# EAGLE board ControlBoard (EAGLE 7.0.0)
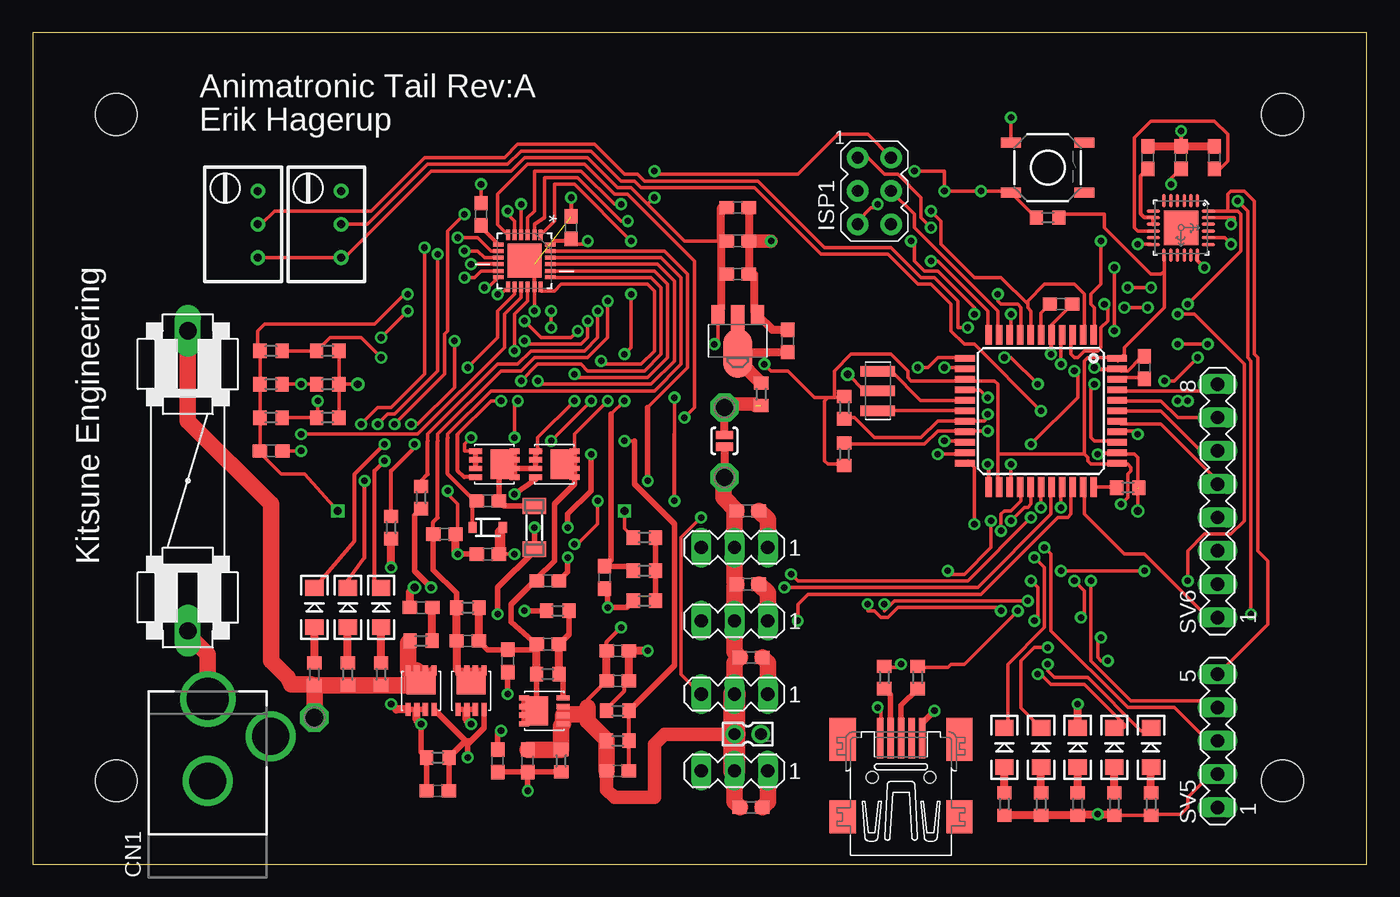
[diagram p0: board, top side]
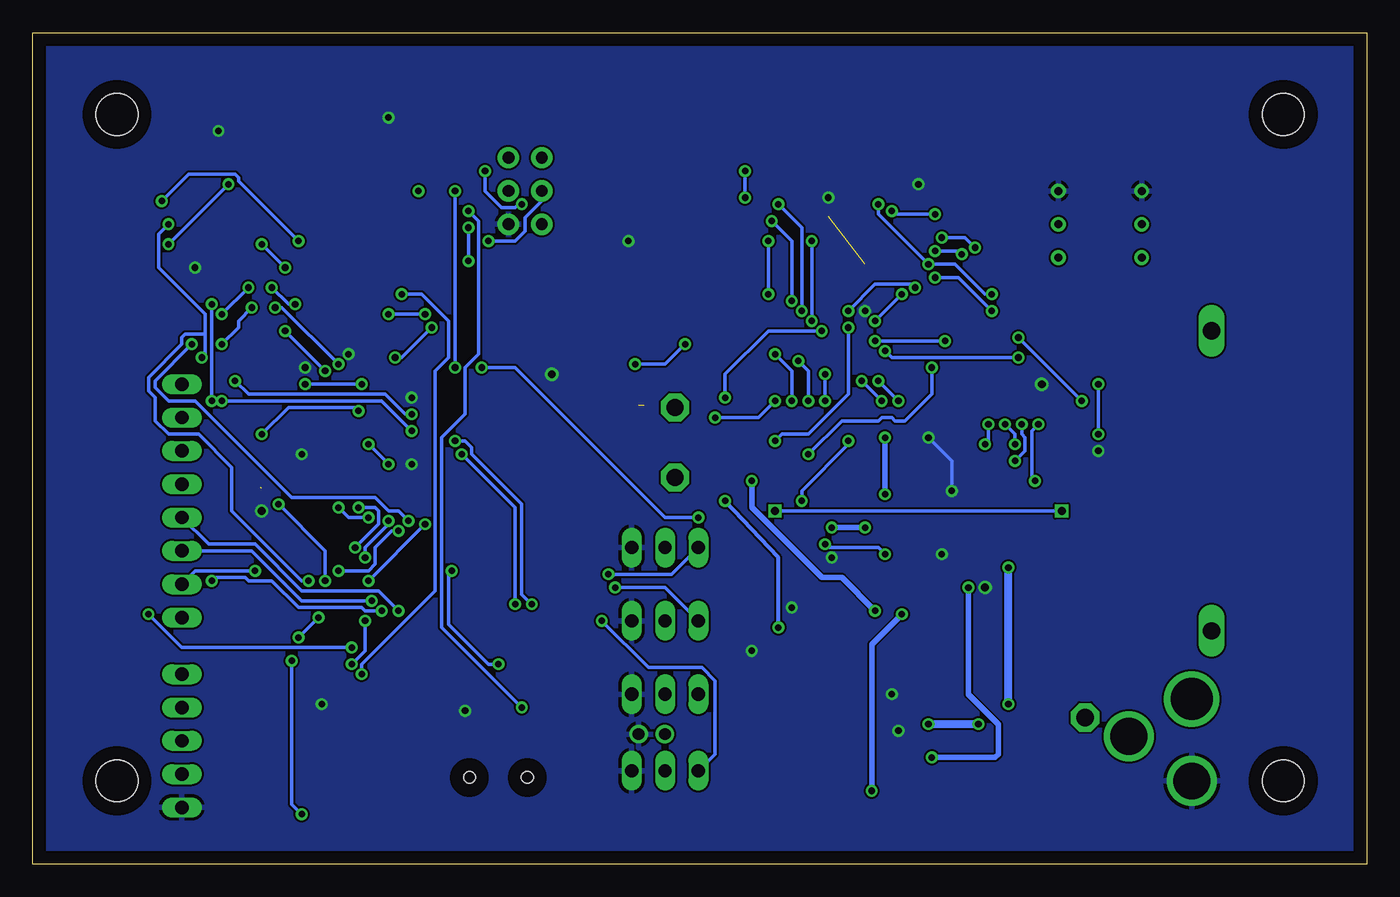
[diagram p1: board, bottom side, seen from below]

Size 101.65 x 63.36 mm. Coordinates in mm from the lower left corner, seen from the top.
Outline: 0,0 101.65,0 101.65,63.36 0,63.36 0,0
Copper layers (1*16): Top 0.035mm / dielectric 1.5mm / Bottom 0.035mm
Design rules "default *": minimum track width 10mil, minimum drill 13mil, track to track 6mil, track to pad 6mil, pad to pad 6mil, via to via 6mil, smd to smd 6mil, copper to edge 40mil, drill to drill 8mil, minimum pad ring 10mil, minimum via ring 8mil, stop-mask expansion 4mil, vias tented up to drill 0mil, thermal gap 10mil
Holes 3.2 mm at 6.35,57.15 6.35,6.35 95.25,6.35 95.25,57.15

## Footprints (pad centres in the part's own frame; a part is rotated, then mirrored left to right if it is on the bottom)
C0603 = smd 1.1 x 1: 1 -0.85,0; 2 0.85,0
DCJACK_2MM_PTH = drill 2.8: GND 0,7.35; GNDBREAK 4.8,10.75 | drill 3.2: PWR 0,13.6
SOD-323 = smd 0.63 x 0.83: A 1.15,0; C -1.15,0
FUSE = drill 1.321 long: 1 -11.43,0; 2 11.43,0
R0603 = smd 1 x 1.1: 1 -0.85,0; 2 0.85,0
TQFP44 = smd 1.5 x 0.5: 1 -5.8,4; 2 -5.8,3.2; 3 -5.8,2.4; 4 -5.8,1.6; 5 -5.8,0.8; 6 -5.8,0; 7 -5.8,-0.8; 8 -5.8,-1.6; 9 -5.8,-2.4; 10 -5.8,-3.2; 11 -5.8,-4; 23 5.8,-4; 24 5.8,-3.2; 25 5.8,-2.4; 26 5.8,-1.6; 27 5.8,-0.8; 28 5.8,0; 29 5.8,0.8; 30 5.8,1.6; 31 5.8,2.4; 32 5.8,3.2; 33 5.8,4 | smd 0.5 x 1.5: 12 -4,-5.8; 13 -3.2,-5.8; 14 -2.4,-5.8; 15 -1.6,-5.8; 16 -0.8,-5.8; 17 0,-5.8; 18 0.8,-5.8; 19 1.6,-5.8; 20 2.4,-5.8; 21 3.2,-5.8; 22 4,-5.8; 34 4,5.8; 35 3.2,5.8; 36 2.4,5.8; 37 1.6,5.8; 38 0.8,5.8; 39 0,5.8; 40 -0.8,5.8; 41 -1.6,5.8; 42 -2.4,5.8; 43 -3.2,5.8; 44 -4,5.8
SOT89 = smd 1 x 1.5: 1 -1.499,-1.981; 3 1.499,-1.981 | smd 1 x 2: 2 0,-1.727 | smd 2.2 x 3.7: 2@1 0,0.94
AVRISP = drill 0.9 pad 1.626: 1 -1.27,2.54; 2 1.27,2.54; 3 -1.27,0; 4 1.27,0; 5 -1.27,-2.54; 6 1.27,-2.54
SM-1206 = smd 1.2 x 1.8: 1 -1.65,0; 2 1.65,0
LED-1206 = smd 1.2 x 1.4: A -1.5,0; C 1.5,0
POWERPAK1212-8 = smd 0.762 x 0.406: D1 1.549,0.991; D2 1.549,0.33; D3 1.549,-0.33; D4 1.549,-0.991 | smd 1.727 x 2.235: DPAD 0.584,0 | smd 0.991 x 0.406: G -1.422,-0.991; S1 -1.422,0.991; S2 -1.422,0.33; S3 -1.422,-0.33
CSTCR6M = smd 0.8 x 2.6: 1 -1.5,0; 2 0,0; 3 1.5,0
RTRIM3299W = drill 0.61: 1 1.27,-2.54; 2 1.27,0; 3 1.27,2.54
TACTILE-SWITCH-SMD = smd 1.524 x 0.762: 1 -2.794,1.905; 2 2.794,1.905; 3 -2.794,-1.905; 4 2.794,-1.905
SJ_2S-NO = smd 0.635 x 1.27: 1 -0.45,0; 2 0.45,0
MA03-1 = drill 1.016 long: 1 -2.54,0; 2 0,0; 3 2.54,0
MA05-1 = drill 1.016 long: 1 -5.08,0; 2 -2.54,0; 3 0,0; 4 2.54,0; 5 5.08,0
MA08-1 = drill 1.016 long: 1 -8.89,0; 2 -6.35,0; 3 -3.81,0; 4 -1.27,0; 5 1.27,0; 6 3.81,0; 7 6.35,0; 8 8.89,0
P1-13 = drill 1.321 pad 2.159 octagon: TP 0,0
QFN50P400X400X100-25N = smd 0.813 x 0.305: 1 -1.981,1.245; 2 -1.981,0.762; 3 -1.981,0.254; 4 -1.981,-0.254; 5 -1.981,-0.762; 6 -1.981,-1.245; 13 1.981,-1.245; 14 1.981,-0.762; 15 1.981,-0.254; 16 1.981,0.254; 17 1.981,0.762; 18 1.981,1.245 | smd 0.305 x 0.813: 7 -1.245,-1.981; 8 -0.762,-1.981; 9 -0.254,-1.981; 10 0.254,-1.981; 11 0.762,-1.981; 12 1.245,-1.981; 19 1.245,1.981; 20 0.762,1.981; 21 0.254,1.981; 22 -0.254,1.981; 23 -0.762,1.981; 24 -1.245,1.981 | smd 2.591 x 2.591: 25 -0.025,0
QFN-24-4MM2 = smd 1.016 x 0.254: 1 -2.066,1.257; 2 -2.066,0.75; 3 -2.066,0.247; 4 -2.066,-0.287; 5 -2.066,-0.792; 6 -2.066,-1.297; 13 2.086,-1.297; 14 2.086,-0.792; 15 2.086,-0.287; 16 2.086,0.247; 17 2.086,0.75; 18 2.086,1.257 | smd 0.254 x 1.016: 7 -1.267,-2.122; 8 -0.762,-2.122; 9 -0.258,-2.122; 10 0.278,-2.122; 11 0.78,-2.122; 12 1.287,-2.122; 19 1.287,2.082; 20 0.78,2.082; 21 0.278,2.082; 22 -0.258,2.082; 23 -0.762,2.082; 24 -1.267,2.082 | smd 2.616 x 2.616: P$1 0.02,-0.01
32005-201 = smd 3.1 x 0.5: 1 3,1.6; 2 3,0.8; 3 3,0; 4 3,-0.8; 5 3,-1.6 | smd 2.5 x 2: M1 -3,-4.45; M2 -3,4.45 | smd 3.3 x 2: M3 2.9,4.45; M4 2.9,-4.45 | hole 0.9: 0,2.2; 0,-2.2
332-02 = drill 0.9 pad 1.27: 1 0,-1; 2 0,1

## Placement (x,y rotation side)
C1  0.1uF  [C0603]  53.72,44.96 0 top
C2  1uF  [C0603]  53.72,47.5 0 top
C3  10uF  [C0603]  53.72,50.04 0 top
C6  1uF  [C0603]  78.36,42.67 0 top
C7  0.1uF  [C0603]  84.71,37.85 90 top
C8  10uF  [C0603]  57.53,39.88 90 top
C9  0.1uF  [C0603]  84.96,53.85 90 top
C10  0.1uF  [C0603]  90.04,53.85 90 top
C11  2.2nF  [C0603]  87.5,53.85 90 top
C12  0.1uF  [C0603]  30.86,5.59 0 top
C13  2.2uF  [C0603]  29.59,19.56 180 top
C14  0.1uF  [C0603]  33.15,17.02 0 top
C15  0.1uF  [C0603]  31.37,25.15 0 top
C16  1uF  [C0603]  41.02,48.51 90 top
C17  0.1uF  [C0603]  18.16,31.5 0 top
C18  0.1uF  [C0603]  34.16,49.53 90 top
C19  0.1uF  [C0603]  43.56,21.84 270 top
C20  0.1uF  [C0603]  34.67,23.62 180 top
C21  0.1uF  [C0603]  34.67,27.69 0 top
C22  0.1uF  [C0603]  37.72,7.87 90 top
C23  0.1uF  [C0603]  35.43,7.87 90 top
C24  10uF  [C0603]  44.58,16.26 0 top
C25  10uF  [C0603]  44.58,13.97 0 top
C26  22pF  [C0603]  44.58,7.11 0 top
C27  10uF  [C0603]  39.24,21.59 0 top
C28  0.1uF  [C0603]  39.24,16.76 0 top
C29  10uF  [C0603]  36.2,15.49 270 top
C30  10uF  [C0603]  54.74,15.75 0 top
C31  10uF  [C0603]  54.74,4.32 0 top
C32  10uF  [C0603]  54.48,21.34 0 top
C33  10uF  [C0603]  54.48,26.92 0 top
CN1  [DCJACK_2MM_PTH]  13.34,-1.02 0 top
D1  BAT20JFILM  [SOD-323]  34.67,25.65 0 top
F1  [FUSE]  11.81,29.21 90 top
F2  500mA  [R0603]  55.5,35.81 270 top
IC1  32U4  [TQFP44]  76.83,34.54 270 top
IC2  MCP170312MB  [SOT89]  53.72,39.88 180 top
ISP1  AVRISP-6  [AVRISP]  64.14,51.31 0 top
L1  8.2uH  [SM-1206]  38.23,25.65 270 top
LED1  RED  [LED-1206]  79.63,8.89 90 top
LED2  RED  [LED-1206]  76.83,8.89 90 top
LED3  RED  [LED-1206]  74.04,8.89 90 top
LED4  RED  [LED-1206]  21.46,19.56 90 top
LED5  RED  [LED-1206]  24,19.56 90 top
LED6  RED  [LED-1206]  26.54,19.56 90 top
LED7  RED  [LED-1206]  85.22,8.89 90 top
LED8  RED  [LED-1206]  82.42,8.89 90 top
Q2  MOSFET-NCHANNELSI7820DN  [POWERPAK1212-8]  35.18,30.48 0 top
Q3  MOSFET-NCHANNELSI7820DN  [POWERPAK1212-8]  39.75,30.48 0 top
Q4  CSTCR6M00G53Z  [CSTCR6M]  64.39,36.07 90 top
R1  22  [R0603]  64.9,14.22 270 top
R2  22  [R0603]  67.44,14.22 270 top
R3  1000  [R0603]  79.63,4.57 270 top
R4  10k  [RTRIM3299W]  15.88,48.77 0 top
R5  10k  [RTRIM3299W]  22.23,48.77 0 top
R6  10k  [R0603]  77.34,49.28 0 top
R7  10k  [R0603]  61.85,34.8 90 top
R8  10k  [R0603]  61.85,31.24 270 top
R9  1000  [R0603]  76.83,4.57 270 top
R10  1000  [R0603]  74.04,4.57 270 top
R11  100k  [R0603]  30.86,8.13 180 top
R12  2  [R0603]  29.59,17.02 180 top
R13  0.01  [R0603]  33.15,19.56 180 top
R14  10  [R0603]  27.3,25.65 270 top
R15  1k  [R0603]  29.59,27.94 270 top
R16  100k  [R0603]  18.16,39.12 180 top
R17  100k  [R0603]  18.16,36.58 180 top
R18  100k  [R0603]  18.16,34.04 180 top
R19  32.4k  [R0603]  22.48,39.12 180 top
R20  10k  [R0603]  22.48,36.58 180 top
R21  22.1k  [R0603]  22.48,34.04 180 top
R22  10k  [R0603]  24,14.48 90 top
R23  10k  [R0603]  21.46,14.48 90 top
R24  10k  [R0603]  26.54,14.48 90 top
R25  32.4k  [R0603]  46.61,24.89 180 top
R26  32.4k  [R0603]  46.61,20.07 0 top
R27  32.4k  [R0603]  46.61,22.35 0 top
R28  0.01  [R0603]  40.26,7.87 270 top
R29  500k  [R0603]  44.58,9.4 180 top
R30  100k  [R0603]  44.58,11.68 0 top
R31  1k  [R0603]  40.01,19.3 180 top
R32  100k  [R0603]  39.24,14.48 0 top
R33  1k  [R0603]  83.44,28.7 180 top
R34  1000  [R0603]  85.22,4.57 270 top
R35  1000  [R0603]  82.42,4.57 270 top
S1  SWITCH-MOMENTARY-2SMD  [TACTILE-SWITCH-SMD]  77.34,53.09 0 top
SJ1  SOLDERJUMPERNO  [SJ_2S-NO]  52.7,32.26 270 top
SV1  [MA03-1]  53.47,7.11 180 top
SV2  [MA03-1]  53.47,12.95 180 top
SV3  [MA03-1]  53.47,24.13 180 top
SV4  [MA03-1]  53.47,18.54 180 top
SV5  [MA05-1]  90.3,9.4 90 top
SV6  [MA08-1]  90.3,27.69 90 top
TP1  PTR1PAD1-13  [P1-13]  21.46,11.18 0 top
TP2  PTR1PAD1-13  [P1-13]  52.7,34.8 270 top
TP3  PTR1PAD1-13  [P1-13]  52.7,29.46 270 top
U1  BQ24630RGET  [QFN50P400X400X100-25N]  37.47,45.97 270 top
U$2  MPU-6050-1  [QFN-24-4MM2]  87.5,48.51 270 top
U$3  SI7617DN-T1-GE3  [POWERPAK1212-8]  29.59,13.21 90 top
U$4  SI7617DN-T1-GE3  [POWERPAK1212-8]  33.4,13.21 90 top
U$6  SI7617DN-T1-GE3  [POWERPAK1212-8]  38.99,11.68 180 top
X1  MINI-USB-32005-201  [32005-201]  66.17,6.6 90 top
X2  332-02  [332-02]  54.48,9.91 90 top

## Library data of the parts
C1-C3 C6-C33 = eagle-ltspice; SPICEMODEL: NONE; SPICEPREFIX: C
CN1 IC1 ISP1 = adafruit
D1 = SparkFun-DiscreteSemi; PROD_ID: DIO-11623
F1 = special
F2 R1-R3 R6-R35 = eagle-ltspice; SPICEMODEL: NONE; SPICEPREFIX: R
IC2 = linear
L1 = inductor-neosid; OC_FARNELL: unknown; OC_NEWARK: unknown
LED1-LED8 = SparkFun-LED
Q2 Q3 = SparkFun-DiscreteSemi; PROD_ID: TRANS-11055
Q4 = murata-filter; MPN: CSTCR6M00G53-R0; OC_FARNELL: 1170434; OC_NEWARK: 25M8759
R4 R5 = rcl
S1 = SparkFun-Electromechanical; PROD_ID: SWCH-08247
SJ1 = SparkFun
SV1-SV6 = con-lstb; OC_FARNELL: unknown; OC_NEWARK: unknown
TP1-TP3 = testpad
U1 = Texas Instruments_By_element14_Batch_1; MPN: BQ24630RGET; OC_FARNELL: 1815719; OC_NEWARK: 63R8367; PACKAGE: VQFN-24; SUPPLIER: Texas Instruments
U$2 = Testing
U$3 U$4 U$6 = SparkFun-DiscreteSemi
X1 = con-cypressindustries; OC_FARNELL: unknown; OC_NEWARK: unknown
X2 = con-garry

## Nets
A2: IC1.38 SV6.5
A3: IC1.39 SV6.6
A4: IC1.40 SV6.7
A5: IC1.41 SV6.8
ADAPTER+: F1.2 R12.2 R22.1 R23.1 R24.1 TP1.TP U$3.D1 U$3.D2 U$3.D3 U$3.D4 U$3.DPAD
D0: IC1.20 SV6.4
D1: IC1.21 SV6.3
D12: IC1.26 SV6.2
D13: IC1.32 SV6.1
D+: IC1.4 R1.1
D-: IC1.3 R2.1
GND: C1.2 C2.2 C3.2 C6.2 C7.2 C8.2 C9.2 C10.2 C11.2 C13.2 C15.2 C16.2 C17.2 C18.2 C19.2 C20.2 C23.2 C24.2 C25.2 C27.2 C29.2 C30.2 C31.2 C32.2 C33.2 CN1.GND IC1.5 IC1.15 IC1.23 IC1.35 IC1.43 IC2.1 ISP1.6 LED1.C Q2.S1 Q2.S2 Q2.S3 Q4.2 R4.3 R5.3 R19.1 R20.1 R21.1 R26.1 R30.1 R33.1 S1.1 SV1.1 SV2.1 SV3.1 SV4.1 SV5.1 U1.17 U1.25 U$2.18 X1.5 X2.1
GNDBREAK: CN1.GNDBREAK
IMUINT1: IC1.25 U$2.12
IMUINT2: IC1.28 SV5.3
LED1: IC1.27 LED3.C
LED2: IC1.1 LED2.C
MISO: IC1.11 ISP1.1
MOSI: IC1.10 ISP1.4
N$1: IC1.16 Q4.3
N$2: IC1.17 Q4.1
N$3: R2.2 X1.3
N$4: C6.1 IC1.6
N$5: C7.1 IC1.42
N$6: C8.1 F2.1 IC2.2 IC2.2@1
N$7: C9.1 U$2.8 U$2.9
N$8: C11.1 U$2.20
N$9: R1.2 X1.2
N$10: C10.1 U$2.10
N$11: LED1.A R3.1
N$12: LED3.A R10.1
N$13: LED2.A R9.1
N$14: C12.1 R11.2 R14.2 U$3.S1 U$3.S2 U$3.S3 U$4.S1 U$4.S2 U$4.S3
N$15: C12.2 R11.1 R15.2 U$3.G U$4.G
N$16: C13.1 R12.1
N$17: C14.1 C15.1 R13.2 U1.2 U$4.D1 U$4.D2 U$4.D3 U$4.D4 U$4.DPAD
N$19: R15.1 U1.3
N$20: C16.1 R14.1 U1.24
N$21: R16.1 R19.2 U1.16
N$22: R17.1 R20.2 U1.15
N$23: R18.1 R21.2 U1.11
N$24: C18.1 U1.7
N$25: C19.1 R27.1 U1.6
N$26: LED5.C U1.8
N$27: LED4.C U1.5
N$28: LED6.C U1.9
N$29: LED6.A R24.2
N$30: LED4.A R23.2
N$31: LED5.A R22.2
N$32: R25.1 R26.2 R27.2
N$33: C21.1 D1.C U1.22
N$34: C20.1 D1.A U1.18
N$35: C21.2 L1.1 Q2.D1 Q2.D2 Q2.D3 Q2.D4 Q2.DPAD Q3.S1 Q3.S2 Q3.S3 U1.20
N$36: Q2.G U1.19
N$37: Q3.G U1.21
N$38: C26.2 R29.1 R30.2 U1.12
N$39: R31.2 U1.23
N$40: C28.2 R31.1 R32.2 U$6.G
N$41: C22.1 C23.1 L1.2 R28.2 U1.14
N$43: CN1.PWR F1.1
N$44: F2.2 SJ1.1 TP2.TP
N$45: LED7.A R34.1
N$46: LED8.A R35.1
N$49: IC1.33 R33.2
PWM1: IC1.31 SV1.3
PWM2: IC1.12 SV2.3
PWM3: IC1.30 SV3.3
PWM4: IC1.29 SV4.3
RST: IC1.13 ISP1.5 R6.1 S1.3
RXLED: IC1.8 LED8.C
SCK: IC1.9 ISP1.3
SCL: IC1.18 R7.1 SV5.4 U$2.23
SDA: IC1.19 R8.1 SV5.5 U$2.24
TRIM1: IC1.36 R4.2
TRIM2: IC1.37 R5.2
TXLED: IC1.22 LED7.C
UVCC: IC1.2 IC1.7 X1.1
VCC: C1.1 C2.1 C3.1 IC1.14 IC1.24 IC1.34 IC1.44 IC2.3 ISP1.2 R3.2 R4.1 R5.1 R6.2 R7.2 R8.2 R9.2 R10.2 R34.2 R35.2 SV5.2 U$2.13
VPACK+: C22.2 C24.1 C25.1 C26.1 C30.1 C31.1 C32.1 C33.1 R28.1 R29.2 SJ1.2 SV1.2 SV2.2 SV3.2 SV4.2 TP3.TP U1.13 U$6.S1 U$6.S2 U$6.S3 X2.2
VREF: C17.1 R16.2 R17.2 R18.2 R25.2 U1.4 U1.10
VSYSTEM: C14.2 C27.1 C28.1 C29.1 Q3.D1 Q3.D2 Q3.D3 Q3.D4 Q3.DPAD R13.1 R32.1 U1.1 U$6.D1 U$6.D2 U$6.D3 U$6.D4 U$6.DPAD

## Tracks (layer width: path | path; a pad name or v marks a point on that pad's centre or on a via)
A2
  Top 0.254: IC1.38 82.93,33.53 85.98,33.53 90.55,28.96 SV6.5
A3
  Top 0.254: IC1.39 85.98,34.54 89.03,31.5 SV6.6
A4
  Top 0.254: IC1.40 82.68,35.31 85.98,35.31 87.25,34.04 SV6.7
A5
  Top 0.254: IC1.41 82.68,36.07 89.79,36.07 SV6.8
ADAPTER+
  Top 0.406: U$3.DPAD 29.26,14.12 29.26,14.22 U$3.D2 U$3.D3 U$3.D4 30.44,14.9
  Top 0.61: 28.6,16.88 R12.2 | 28.57,14.73 U$3.D1 | 28.66,13.63 29.26,14.22
  Top 0.813: 21.21,13.72 R23.1
  Top 1.27: U$3.D2 U$3.D1 28.6,16.88 | TP1.TP R23.1 R22.1 R24.1 28.66,13.63 | 21.21,13.72 19.68,13.72 19.43,14.22 18.16,15.49 18.16,27.43 11.81,33.78 F1.2
D0  (via drill 0.5)
  Top 0.254: v63.63,19.81 63.63,19.3 64.14,19.3 64.64,18.8 65.15,18.8 65.91,19.56 73.53,19.56 v73.79,19.3 | v69.47,32.26 70.99,32.26 IC1.20
  Bottom 0.254: v63.63,19.81 64.39,20.57 64.39,27.43 68.2,31.24 68.2,31.75 68.71,32.26 v69.47,32.26 | v73.79,19.3 75.31,20.83 81.15,20.83 84.71,24.38 88.27,24.38 SV6.4
D1  (via drill 0.5)
  Top 0.254: v64.9,19.81 64.9,19.3 65.66,20.07 v75.82,20.07 | v68.96,31.24 70.99,31.24 IC1.21
  Bottom 0.254: v64.9,19.81 64.9,27.18 v68.96,31.24 | v75.82,20.07 81.15,20.07 84.96,23.88 SV6.3
D12  (via drill 0.5)
  Top 0.254: 73.79,25.15 v73.79,25.4 73.79,26.67 74.04,26.92 74.55,26.92 75.31,27.69 75.31,28.7 IC1.26 | v78.36,22.35 v84.71,22.35
  Bottom 0.254: v73.79,25.4 74.3,25.4 75.56,24.13 75.56,22.86 76.07,22.35 v78.36,22.35 | v84.71,22.35 89.28,22.35 SV6.2
D13
  Top 0.254: IC1.32 80.14,28.7 80.14,26.67 83.19,23.62 84.71,23.62 89.53,18.8 SV6.1
D+  (via drill 0.5)
  Top 0.254: v78.36,38.1 78.36,40.13 IC1.4 | v84.96,42.42 v83.19,42.42 | v89.53,39.62 v87.25,39.62 | v73.03,26.16 73.03,24.13 70.99,22.1 69.98,22.1 v69.72,22.35 | v66.17,15.24 65.91,14.99 64.9,14.99 R1.1
  Bottom 0.254: v83.19,42.42 82.68,42.42 v78.36,38.1 | v89.53,39.62 92.33,36.83 92.33,36.32 91.31,35.31 89.28,35.31 81.92,27.94 75.56,27.94 74.55,26.92 73.79,26.92 v73.03,26.16 | v69.72,22.35 69.98,22.1 69.98,18.29 66.93,15.24 v66.17,15.24 | v87.25,39.62 85.98,40.89 85.98,41.4 v84.96,42.42
D-  (via drill 0.5)
  Top 0.254: v81.66,42.67 81.92,42.42 81.92,41.4 81.41,40.89 81.41,39.37 81.15,39.12 80.14,39.12 79.63,38.61 79.38,38.61 79.12,38.86 79.12,40.13 IC1.3 | v85.22,43.94 v83.44,43.94 | v87.25,41.91 88.52,41.91 92.33,38.1 92.33,26.16 91.31,25.15 89.28,25.15 88.01,23.88 v88.01,21.59 | v75.06,19.3 70.99,15.24 69.98,15.24 69.72,14.99 67.44,14.99 R2.1
  Bottom 0.254: v83.44,43.94 82.17,42.67 v81.66,42.67 | v87.25,41.91 v85.22,43.94 | v88.01,21.59 87.76,21.84 85.47,21.84 85.22,21.59 83.44,21.59 81.41,19.56 76.58,19.56 76.33,19.3 v75.06,19.3
GND  (via drill 0.5, 0.6)  (2 unrouted)
  Top 0.254: R21.1 R20.1 | R20.1 R19.1 | R20.1 v24.77,36.58 | C17.2 v20.45,31.5 | 38.23,43.94 U1.17 v38.23,42.16 | C15.2 32.38,25.4 32.38,27.43 31.62,28.19 v31.62,28.45 | v33.4,32.51 32.89,32 32.89,31.5 33.66,31.5 Q2.S1 | v74.55,56.9 S1.1 74.55,54.86 | C18.2 v34.16,51.82 | v84.2,26.92 84.2,28.61 | v62.1,37.34 63.37,36.07 Q4.2 | v72.77,35.56 72.19,36.14 IC1.15 | C6.2 77.64,41.1 IC1.5 | IC1.43 82.93,37.59 83.44,37.59 84.45,38.61 C7.2 | IC1.35 82.68,31.24 83.95,31.24 84.2,30.99 84.2,29.21 84.45,28.96 84.45,28.7 R33.1
  Top 0.305: v72.77,30.48 72.83,30.42 IC1.23 | v77.6,38.86 77.64,38.9 IC1.5 | v80.9,37.85 81,37.74 IC1.43 | v81.15,31.24 81.31,31.34 IC1.35 | v87.5,55.88 C11.2 | v89.28,45.47 88.76,45.99 U$2.18 | U1.17 38.23,45.72 37.74,45.72 U1.25 | v41.02,50.8 C16.2 | R30.1 43.73,11.85 45.09,13.21 45.09,13.63 C25.2
  Top 0.406: Q2.S3 Q2.S2 Q2.S1 | v68.71,11.68 67.77,10.74 X1.5 | v36.2,12.95 C29.2 | C23.2 35.43,9.91 v35.69,10.16 | v32.38,23.62 C20.2 | R26.1 45.25,19.56 v43.81,19.56 43.81,20.74 C19.2 | C27.2 40.77,22.26 v40.77,23.37
  Top 0.61: C3.2 C2.2 C1.2 54.99,44.96 54.99,42.09 IC2.1 56.35,40.73 C8.2 | C10.2 C11.2 C9.2 | C13.2 28.74,20.74 v29.08,21.08 | C25.2 C24.2 v46.86,16.26 | v32.38,23.62 32.22,23.79 C15.2 | LED1.C v79.63,12.19
  Top 1.016: v56.26,47.5 C2.2
  Top 1.27: SV2.1 56.01,15.33 C30.2 | C31.2 56.01,4.74 SV1.1 | SV4.1 56.01,20.66 C32.2 | SV3.1 56.01,26.25 C33.2
  Bottom 0.254: v31.62,28.45 31.62,30.73 v33.4,32.51
  pour Bottom: 0,76.07 101.73,76.07 101.73,0 0,0
IMUINT1  (via drill 0.5)
  Top 0.254: v82.42,45.47 v82.42,40.64 | v84.2,47.24 85.22,47.24 U$2.12 | v79.38,37.59 79.63,37.34 79.63,35.56 v76.07,32 | v74.55,30.48 74.55,28.96 IC1.25
  Bottom 0.254: v84.2,47.24 v82.42,45.47 | v79.38,37.59 v82.42,40.64 | v74.55,30.48 v76.07,32
IMUINT2  (via drill 0.5)
  Top 0.254: v77.09,24.13 77.6,23.62 77.6,17.78 83.44,11.94 87,11.94 89.53,9.4 SV5.3 | IC1.28 v76.83,27.18
  Bottom 0.254: v77.09,24.13 75.31,25.91 75.31,26.92 75.56,27.18 v76.83,27.18
LED1  (via drill 0.5)
  Top 0.254: LED3.C 74.3,10.67 74.3,15.24 77.09,18.03 77.09,22.61 v76.33,23.37 | v74.55,26.16 75.56,27.18 75.82,27.18 76.07,27.43 76.07,28.7 IC1.27
  Bottom 0.254: v76.33,23.37 76.33,24.13 74.55,25.91 v74.55,26.16
LED2  (via drill 0.5)
  Top 0.254: LED2.C 75.31,11.91 75.31,15.49 76.33,16.51 v77.34,16.51 | v81.41,47.5 81.41,44.2 80.64,43.43 80.64,42.67 80.9,42.42 80.9,40.39 IC1.1 | v91.82,50.55 92.58,49.78 92.58,38.61 92.84,38.35 v92.84,19.05
  Bottom 0.254: v81.41,47.5 85.98,52.07 85.98,52.32 86.23,52.58 89.79,52.58 v91.82,50.55 | v92.84,19.05 90.3,16.51 v77.34,16.51
MISO  (via drill 0.5)
  Top 0.254: v68.45,48.51 67.69,49.28 67.69,50.8 65.91,52.58 64.9,52.58 63.63,53.85 ISP1.1 | v68.45,45.97 68.96,45.97 72.77,42.16 72.77,40.39 IC1.11
  Bottom 0.254: v68.45,45.97 v68.45,48.51
MOSI
  Top 0.254: ISP1.4 67.18,49.53 67.18,48.51 73.53,42.16 73.53,40.39 IC1.10
N$1
  Top 0.254: IC1.16 67.65,35.34 65.43,37.57 Q4.3
N$2
  Top 0.254: Q4.1 71.01,34.57 IC1.17
N$3
  Top 0.406: R2.2 66.17,12.1 X1.3
N$4
  Top 0.254: C6.1 76.83,42 IC1.6
N$5
  Top 0.254: IC1.42 82.93,37.08 84.45,37.08 C7.1
N$6
  Top 0.406: IC2.2 53.72,39.62 IC2.2@1
  Top 0.61: IC2.2@1 53.81,39.03 C8.1
  Top 1.016: F2.1 53.72,38.44 53.72,39.62
N$7
  Top 0.305: U$2.9 U$2.8 84.71,49.28 84.45,49.53 84.45,52.49 C9.1
N$8  (via drill 0.5)
  Top 0.254: C11.1 86.74,52.24 v86.74,51.82 | v91.31,47.24 90.82,47.73 U$2.20
  Bottom 0.254: v86.74,51.82 v91.31,47.24
N$9
  Top 0.406: R1.2 65.37,12.9 X1.2
N$10
  Top 0.254: C10.1 90.04,52.83 90.3,52.83 91.06,53.59 91.06,55.63 90.04,56.64 85.22,56.64 83.95,55.37 83.95,48.51 84.2,48.26 85.22,48.26 U$2.10
N$11
  Top 0.61: R3.1 LED1.A
N$12
  Top 0.61: R10.1 LED3.A
N$13
  Top 0.61: R9.1 LED2.A
N$14  (via drill 0.5)
  Top 0.406: C12.1 R11.2 29.59,8.55 v29.59,10.67 | U$3.S3 U$3.S2 U$3.S1 | U$4.S3 U$4.S2 U$4.S1
  Top 0.61: v33.4,10.67 33.07,11 U$4.S2 | v29.59,10.67 29.26,11 U$3.S2 | U$3.S1 27.71,11.79 v27.3,12.19 | v27.3,22.61 R14.2
  Bottom 0.61: v29.59,10.67 v33.4,10.67 | v27.3,12.19 v27.3,22.61
N$15  (via drill 0.5)
  Top 0.406: C12.2 R11.1 32.97,9.39 32.97,9.4 | U$3.G 32.97,9.4 | 32.97,9.4 33.4,9.4 | 33.4,9.4 34.39,10.39 U$4.G | 33.4,9.4 33.15,9.14 v33.15,8.13 | R15.2 29.08,26.58 29.08,22.35 v30.35,21.08
  Bottom 0.406: v33.15,8.13 28.32,8.13 28.07,8.38 28.07,10.67 30.35,12.95 v30.35,21.08
N$16
  Top 0.61: R12.1 C13.1
N$17  (via drill 0.5)
  Top 0.254: U1.2 38.23,48.77 38.99,49.28 38.99,52.32 41.53,52.32 44.83,49.02 v45.34,49.02 | v43.81,42.93 43.81,40.13 42.29,38.61 38.23,38.61 37.21,37.59 35.69,37.59 30.86,32.77 30.86,32.26
  Top 0.305: C15.1 30.52,26.07 30.86,26.42 30.86,32.26
  Top 0.406: U$4.DPAD 33.07,14.12 U$4.D2 | U$4.D1 U$4.D2 | U$4.D2 U$4.D3 U$4.D4 | R13.2 32.3,20.66 30.52,22.44 C15.1
  Top 0.61: R13.2 C14.1 32.3,14.87 U$4.D1
  Bottom 0.254: v43.81,42.93 43.81,47.5 v45.34,49.02
N$19  (via drill 0.5)
  Top 0.254: U1.3 37.72,49.28 38.23,49.78 38.23,52.83 41.78,52.83 44.32,50.29 v44.83,50.29 | v43.05,42.16 43.05,40.13 42.04,39.12 37.97,39.12 36.96,38.1 35.43,38.1 30.1,32.77 30.1,32.26
  Top 0.305: R15.1 29.59,29.21 30.1,29.72 30.1,32.26
  Bottom 0.254: v43.05,42.16 43.05,48.51 v44.83,50.29
N$20  (via drill 0.5)
  Top 0.254: v42.29,41.4 42.29,40.13 41.78,39.62 37.72,39.62 v37.47,39.88 | v42.29,47.5 42.04,47.24 41.02,47.24 40.77,47.5 C16.1 | v32.13,39.88 32.13,36.32 29.34,33.53 v28.83,33.53
  Top 0.305: C16.1 40.93,47.66 40.77,47.5 39.73,47.5 U1.24 | R14.1 27.3,29.97 29.08,31.75 v29.08,32 29.08,32.26
  Bottom 0.254: v42.29,47.5 v42.29,41.4 | v32.13,39.88 v37.47,39.88 | v28.83,33.53 28.83,32.26 v29.08,32
N$21  (via drill 0.5)
  Top 0.254: R16.1 R19.2 22.64,40.13 25.02,40.13 v26.54,38.61 | U1.16 37.72,42.93 36.7,41.91 v36.7,39.12
  Bottom 0.254: v36.7,39.12 36.2,38.61 v26.54,38.61
N$22  (via drill 0.5)
  Top 0.254: R17.1 v20.45,36.58 R20.2 | v20.45,32.77 29.34,32.77 35.94,39.37 35.94,41.91 37.21,43.18 U1.15
  Bottom 0.254: v20.45,36.58 v20.45,32.77
N$23  (via drill 0.5)
  Top 0.254: R18.1 R21.2 21.72,34.04 v21.72,35.31 | U1.11 34.16,45.21 33.66,44.7 v32.89,44.7 | v26.54,40.13 v28.57,42.16
  Bottom 0.254: v21.72,35.31 v26.54,40.13 | v32.89,44.7 31.11,44.7 v28.57,42.16
N$24
  Top 0.305: U1.7 34.16,48.54
  Top 0.406: 34.16,48.54 C18.1
N$25  (via drill 0.5)
  Top 0.254: U1.6 35.43,48.74 35.43,51.05 37.72,53.34 42.04,53.34 44.32,51.05 45.34,51.05 50.42,45.97 50.42,34.8 v49.66,34.04 | 44.07,34.29 v45.09,35.31
  Top 0.406: R27.1 45.42,22.69 C19.1 44.07,23.2 44.07,34.29
  Bottom 0.254: v45.09,35.31 46.35,34.04 v49.66,34.04
N$26  (via drill 0.5)
  Top 0.254: U1.8 34.92,46.74 33.91,47.75 v32.38,47.75 | v25.02,33.53 26.29,34.8 27.3,34.8 29.84,37.34 v29.84,46.99
  Top 0.305: LED5.C 24,21.59 25.27,23.37 v25.27,29.21
  Bottom 0.254: v25.02,33.53 25.53,33.02 25.53,29.46 v25.27,29.21 | v29.84,46.99 30.61,47.75 v32.38,47.75
N$27  (via drill 0.5)
  Top 0.254: U1.5 36.7,49.02 36.2,49.53 v36.2,49.78 | v27.56,33.53 31.37,37.34 31.37,40.39 31.62,40.64 31.62,48.26 v32.89,49.53
  Top 0.305: LED4.C 24.51,24.64 24.51,29.72 v26.8,32
  Bottom 0.254: v36.2,49.78 35.94,49.53 v32.89,49.53 | v27.56,33.53 26.8,32.77 v26.8,32
N$28  (via drill 0.5)
  Top 0.254: U1.9 34.42,46.23 33.91,46.74 v32.89,46.74 | v26.29,33.53 27.05,34.29 27.56,34.29 30.86,37.59 v30.86,46.48
  Top 0.305: LED6.C 26.06,21.06 26.04,24.13 26.04,29.97 v26.8,30.73
  Bottom 0.254: v26.29,33.53 26.29,32.77 26.04,32.51 26.04,31.5 v26.8,30.73 | v32.89,46.74 31.11,46.74 v30.86,46.48
N$29
  Top 0.61: R24.2 LED6.A
N$30
  Top 0.61: R23.2 LED4.A
N$31
  Top 0.61: R22.2 LED5.A
N$32
  Top 0.406: R26.2 R27.2 R25.1
N$33
  Top 0.254: U1.22 47.88,46.23 49.4,44.7 49.4,38.1 47.37,36.07 34.92,36.07 31.62,32.77 31.62,32.51
  Top 0.305: D1.C 33.52,27.39 C21.1 33.66,27.69 31.62,29.72 31.62,32.51
N$34  (via drill 0.5)
  Top 0.254: v43.31,38.35 43.56,38.1 46.35,38.1 47.37,39.12 47.37,43.69 46.86,44.2 40.26,44.2 39.75,43.69 38.73,43.69 38.73,43.94 U1.18 | 39.75,32.51 v42.55,35.31 | v41.27,24.38 41.53,24.38 43.05,25.91 v43.05,27.69 | C20.1 v36.7,23.62
  Top 0.305: D1.A 35.82,23.76 | v39.5,32.26 39.75,32.51
  Top 0.61: C20.1 35.52,25.35 D1.A
  Bottom 0.254: v41.27,24.38 41.02,24.13 37.21,24.13 v36.7,23.62 | v43.05,27.69 43.05,28.45 39.5,32 v39.5,32.26 | v43.31,38.35 42.55,37.59 v42.55,35.31
N$35  (via drill 0.5)
  Top 0.254: U1.20 47.37,45.21 48.39,44.2 48.39,38.61 46.86,37.08 41.53,37.08 v41.27,37.34 | v41.27,35.31 38.48,32.51 38.48,31.75 38.73,31.5 38.48,31.24 38.33,31.24
  Top 0.406: Q3.S1 38.33,31.24 Q3.S2 Q3.S3 Q2.D3 | Q2.D3 36.09,30.15 Q2.DPAD 35.52,30.24 C21.2 35.9,27.3 L1.1 | Q2.D4 Q2.D3 | Q2.D3 Q2.D2 Q2.D1
  Bottom 0.254: v41.27,35.31 v41.27,37.34
N$36  (via drill 0.5)
  Top 0.254: U1.19 39.47,44.7 47.12,44.7 47.88,43.94 47.88,38.86 46.61,37.59 42.29,37.59 41.78,38.1 38.48,38.1 v37.21,36.83 | v35.69,35.31 34.92,35.31 32.38,32.77
  Top 0.305: 33.73,29.46 Q2.G 32.87,29.49 32.38,29.97 32.38,32.77
  Bottom 0.254: v35.69,35.31 v37.21,36.83
N$37  (via drill 0.5)
  Top 0.254: U1.21 47.62,45.72 48.9,44.45 48.9,38.35 47.12,36.58 38.73,36.58 v38.48,36.83 | v36.7,32.51 36.7,35.05 v36.96,35.31
  Top 0.406: Q3.G 38.33,29.31 v36.7,28.19
  Bottom 0.254: v36.96,35.31 v38.48,36.83
  Bottom 0.406: v36.7,28.19 v36.7,32.51
N$38  (via drill 0.5)
  Top 0.254: U1.12 34.68,43.93 34.67,43.94 v34.42,43.94 | v39.5,42.16 v39.5,40.89 | 45.85,32.26 v45.09,32.26
  Top 0.305: C26.2 R29.1 R30.2
  Top 0.406: R30.2 48.9,15.15 48.9,25.91 45.85,28.96 45.85,32.26
  Bottom 0.254: v39.5,42.16 37.47,44.2 34.67,44.2 v34.42,43.94 | v39.5,40.89 39.5,35.81 42.55,32.77 44.58,32.77 v45.09,32.26
N$39  (via drill 0.5)
  Top 0.254: U1.23 48.13,46.74 49.91,44.96 49.91,37.85 46.86,34.8
  Top 0.406: R31.2 v37.47,19.3 | v46.86,29.21 46.86,34.8
  Bottom 0.406: v37.47,19.3 40.01,21.84 41.53,21.84 46.86,27.18 v46.86,29.21
N$40
  Top 0.406: U$6.G 40.41,14.16 R32.2 | C28.2 40.85,17.53 R31.1
  Top 0.61: R32.2 C28.2
N$41  (via drill 0.5)
  Top 0.254: 36.7,43.69 36.7,43.43 35.43,42.16 35.43,40.13 v33.15,37.85
  Top 0.305: U1.14 36.7,43.69
  Top 0.406: R28.2 C22.1 | C23.1 C22.1 | C22.1 v37.72,5.59 | v35.43,19.05 35.43,21.08 38.23,23.88 L1.2 v38.23,25.65 | v40.77,25.65 40.77,26.67 42.55,28.45 v42.55,31.24
  Bottom 0.254: v42.55,31.24 40.01,33.78 37.21,33.78 36.96,34.04 36.2,34.04 35.94,33.78 35.18,33.78 33.15,35.81 v33.15,37.85
  Bottom 0.406: v37.72,5.59 37.72,16.76 v35.43,19.05 | v38.23,25.65 v40.77,25.65
N$43
  Top 1.27: CN1.PWR 13.34,16 11.81,17.53 F1.1
N$44  (1 unrouted)
  Top 0.61: SJ1.1 TP2.TP
  Top 1.016: TP2.TP 52.96,35.05 54.99,35.05 55.08,34.96
N$45
  Top 0.61: R34.1 LED7.A
N$46
  Top 0.61: R35.1 LED8.A
N$49
  Top 0.254: IC1.33 82.55,28.74 R33.2
PWM1  (via drill 0.5)
  Top 0.254: IC1.31 79.12,28.7 79.12,26.67 78.87,26.42 78.11,26.42 72.26,20.57 59.05,20.57 58.29,19.81 v58.29,18.54
  Bottom 0.254: v58.29,18.54 54.74,14.99 50.67,14.99 49.66,13.97 49.66,8.38 SV1.3
PWM2  (via drill 0.5)
  Top 0.254: IC1.12 70.99,38.61 68.96,38.61 68.2,37.85 v67.44,37.85 67.18,37.85 | v50.93,26.42 49.4,24.89 49.4,14.48 SV2.3
  Bottom 0.254: v67.44,37.85 64.9,37.85 53.47,26.42 v50.93,26.42
PWM3  (via drill 0.5)
  Top 0.254: v76.07,26.42 71.25,21.59 58.29,21.59 v57.78,22.1 | v78.36,27.18 78.36,28.7 IC1.30
  Bottom 0.254: v76.07,26.42 77.6,26.42 v78.36,27.18 | v57.78,22.1 52.96,22.1 SV3.3
PWM4  (via drill 0.5)
  Top 0.254: v57.28,21.08 72.01,21.08 77.6,26.67 77.6,28.7 IC1.29
  Bottom 0.254: v57.28,21.08 53.47,21.08 SV4.3
RST  (via drill 0.5)
  Top 0.254: R6.1 76.45,49.28 S1.3 74.55,51.31 v72.26,51.31 v69.47,51.31 69.47,52.83 v67.18,52.83 | ISP1.5 62.87,49.02 63.88,50.04 64.14,50.04 v64.39,50.29 | IC1.13 70.99,37.85 69.72,37.85 69.47,37.59 v69.47,37.85
  Bottom 0.254: v64.39,50.29 64.64,50.29 64.9,50.04 65.91,50.04 67.18,51.31 v67.18,52.83 | v69.47,51.31 v69.47,37.85
RXLED  (via drill 0.5)
  Top 0.254: IC1.8 75.31,40.39 75.31,42.42 75.06,42.67 73.79,42.67 73.53,42.93 v73.53,43.43 | v76.58,14.48 76.83,14.48 77.6,13.72 80.14,13.72 83.19,10.67 83.19,10.41 82.42,10.41 LED8.C
  Bottom 0.254: v73.53,43.43 72.01,43.43 69.98,41.4 69.98,38.61 70.99,37.59 70.99,20.83 76.58,15.24 v76.58,14.48
SCK  (via drill 0.5)
  Top 0.254: v66.93,47.5 67.18,47.5 67.18,45.97 67.94,45.21 68.96,45.21 71.75,42.42 v71.75,41.91 | v74.55,41.91 74.55,40.39 IC1.9
  Bottom 0.254: v66.93,47.5 64.9,47.5 64.14,48.26 64.14,49.28 62.87,50.55 ISP1.3 | v74.55,41.91 v71.75,41.91
SCL  (via drill 0.5)
  Top 0.254: R7.1 61.85,34.04 62.61,34.04 64.14,32.51 67.69,32.51 68.96,33.78 70.99,33.78 IC1.18 71.25,33.78 72.52,33.78 72.77,34.04 v72.77,34.29 | v86.23,36.83 87,36.83 v88.77,38.61 | v91.31,48.77 91.57,49.02 91.57,49.28 89.79,49.28 U$2.23 | v80.64,21.59 80.64,15.49 83.69,12.45 89.79,12.45 SV5.4
  Bottom 0.254: v86.23,36.83 85.22,35.81 74.8,35.81 73.28,34.29 v72.77,34.29 | v88.77,38.61 88.52,38.86 88.52,40.39 | 88.52,40.39 88.52,41.91 92.08,45.47 92.08,48.01 v91.31,48.77 | 88.52,40.39 90.04,40.39 90.3,40.13 90.3,39.62 92.84,37.08 92.84,36.07 92.33,35.56 92.33,33.78 91.31,32.77 89.03,32.77 86.49,30.23 86.49,26.92 81.15,21.59 v80.64,21.59
SDA  (via drill 0.5)
  Top 0.254: R8.1 61.85,32 67.94,32 68.96,33.02 70.99,33.02 IC1.19 71.25,33.02 v72.77,33.02 | v87.25,35.31 v88.01,35.31 | v88.01,42.67 92.08,46.74 92.08,49.53 91.82,49.78 91.06,49.78 | 91.06,49.78 89.79,49.78 U$2.24 | SV5.5 94.11,18.29 94.11,23.11 93.34,23.88 93.34,38.61 93.09,38.86 93.09,50.55 92.33,51.31 91.31,51.31 91.06,51.05 91.06,49.78
  Bottom 0.254: v87.25,35.31 75.06,35.31 v72.77,33.02 | v88.01,42.67 v88.01,35.31
TRIM1  (via drill 0.5)
  Top 0.254: R4.2 17.4,48.77 18.41,49.78 25.78,49.78 29.84,53.85 35.94,53.85 36.96,54.86 42.8,54.86 45.09,52.58 46.1,52.58 46.61,52.07 55.24,52.07 60.33,46.99 65.41,46.99 67.69,44.7 68.71,44.7 70.48,42.93 70.48,40.89 v71.25,40.89 | v80.9,36.58 80.64,36.32 80.64,32.51 80.9,32.26 82.42,32.26 IC1.36 | v74.04,38.61 74.55,38.61 v76.58,36.58
  Bottom 0.254: 80.64,36.32 v80.9,36.58 v76.58,36.58 | v71.25,40.89 73.53,38.61 v74.04,38.61
TRIM2  (via drill 0.5)
  Top 0.254: R5.2 25.53,48.77 30.1,53.34 36.2,53.34 37.21,54.36 42.55,54.36 44.83,52.07 45.85,52.07 46.35,51.56 54.99,51.56 60.07,46.48 65.15,46.48 67.44,44.2 68.45,44.2 69.98,42.67 69.98,40.64 70.99,39.62 71.75,39.62 v76.83,34.54 | v84.2,32.77 83.95,33.02 82.68,33.02 IC1.37
  Bottom 0.254: v76.83,34.54 77.09,34.8 82.17,34.8 v84.2,32.77
TXLED  (via drill 0.5)
  Top 0.254: LED7.C 84.96,10.16 84.45,10.16 80.39,14.22 77.85,14.22 77.34,14.73 v77.34,15.24 | v76.33,18.54 76.58,18.8 76.58,21.08 v76.07,21.59 | v71.75,25.91 71.75,30.23 71.25,30.73 IC1.22
  Bottom 0.254: v76.33,18.54 76.33,16.26 v77.34,15.24 | v71.75,25.91 v76.07,21.59
UVCC  (via drill 0.5)
  Top 0.254: 75.82,42.67 75.82,42.42 76.07,42.16 76.07,40.39 IC1.7 | 75.82,42.67 75.82,42.93 77.09,44.2 79.38,44.2 80.14,43.43 80.14,40.39 IC1.2 | 75.82,42.67 73.79,44.7 71.75,44.7 69.22,47.24 69.22,49.02 v68.45,49.78 | v64.39,11.94 64.64,11.68 64.64,9.65 X1.1
  Bottom 0.254: v68.45,49.78 67.69,49.02 67.69,38.86 68.71,37.85 68.71,34.29 70.48,32.51 70.48,18.03 v64.39,11.94
VCC  (via drill 0.5)
  Top 0.254: R4.1 R5.1 23.75,46.23 30.35,52.83 36.45,52.83 37.47,53.85 42.29,53.85 44.58,51.56 45.59,51.56 46.86,50.29 | 53.21,50.04 52.96,49.78 C3.1 | 46.86,50.29 49.66,47.5 52.45,47.5 | R8.2 61.85,30.48 60.58,30.48 60.33,30.73 60.33,35.31 60.58,35.56 | 61.09,35.56 61.85,35.56 R7.2 | 61.09,35.56 60.58,35.56 | 60.58,35.56 59.56,35.56 57.53,37.59 56.26,37.59 v55.75,38.1 | v51.94,39.62 52.2,39.88 52.2,41.66 IC2.3 | 61.09,35.56 61.09,37.59 62.36,38.86 65.41,38.86 66.67,37.59 66.67,37.08 66.93,36.83 70.99,36.83 IC1.14 71.25,36.83 73.28,36.83 73.53,36.58 73.53,31.24 | 73.53,31.24 73.53,28.96 IC1.24 | 80.14,31.24 80.39,30.99 80.39,30.73 80.64,30.48 82.42,30.48 IC1.34 82.68,30.48 83.44,30.48 83.69,30.23 83.69,29.97 83.44,29.72 83.44,27.94 v82.93,27.43 | 73.53,31.24 80.14,31.24 | 80.14,31.24 80.14,38.35 80.39,38.61 82.42,38.61 IC1.44 82.68,38.35 83.19,38.86 83.19,39.37 86.23,42.42 86.23,45.21 | SV5.2 89.79,6.86 88.01,5.08 88.01,4.32 87.5,3.81 85.22,3.81 R34.2 R35.2 | 86.23,45.21 85.98,44.96 85.22,44.96 81.66,48.51 81.66,49.53 78.11,49.53 78.11,49.28 R6.2 | 86.23,45.21 86.23,46.23 U$2.13 | 46.86,50.29 v47.37,50.8 | v47.37,52.83 47.62,52.58 58.29,52.58 61.34,55.63 63.63,55.63 ISP1.2 | v81.41,17.27 81.15,17.02 81.15,15.75 81.41,15.49 v81.92,15.49 | v79.88,18.8 80.14,19.05 80.14,20.83 v79.38,21.59
  Top 0.61: C3.1 52.45,50.04 52.45,47.5 | 52.45,47.5 52.45,44.96 | 52.45,47.5 C2.1 | IC2.3 52.45,42.42 52.45,44.96 | 52.45,44.96 C1.1 | R10.2 R9.2 R3.2 79.88,3.81 v81.15,3.81 82.42,3.81 R35.2
  Bottom 0.254: v55.75,38.1 53.47,38.1 v51.94,39.62 | v47.37,50.8 v47.37,52.83 | v79.88,18.8 v81.41,17.27 | v79.38,21.59 79.38,23.88 v82.93,27.43 | v81.92,15.49 81.92,4.57 v81.15,3.81
VPACK+  (via drill 0.5)
  Top 0.254: U1.13 35.67,43.45 35.69,43.43 v35.43,43.43 | v41.53,40.64 41.02,40.13 38.73,40.13 v37.47,41.4 | 48.9,32.77 v48.9,35.56
  Top 0.305: R29.2 43.73,9.49 | C25.1 42.29,12.53 42.29,11.94 42.22,12.01 | C24.1 43.73,16.93 v44.83,18.03 | v48.9,27.69 48.9,32.77
  Top 0.406: U$6.S3 U$6.S2 | 40.26,10.54 U$6.S1
  Top 0.61: C25.1 C24.1 | SJ1.2 TP3.TP
  Top 0.813: 43.56,6.95 C26.1 | 42.22,12.01 42.22,11.61 42.04,11.43 | 40.49,11.43 U$6.S2
  Top 1.016: SV2.2 53.47,9.91 48.13,9.91 47.37,9.14 47.37,5.08 44.32,5.08 43.73,5.68 C26.1 | TP3.TP 52.62,29.38
  Top 1.27: U$6.S2 U$6.S1 | C22.2 R28.1 40.26,10.54 | C26.1 R29.2 | 43.73,9.49 42.29,10.92 42.29,11.94 | 42.04,11.43 40.49,11.43 | SV2.2 53.47,15.33 C30.1 53.47,16.17 SV4.2 53.47,21.17 C32.1 53.47,21.5 SV3.2 53.47,26.76 C33.1 52.62,27.94 52.62,29.38 | SV1.2 53.47,4.74 C31.1
  Top 1.676: SV1.2 53.47,9.89 X2.2 53.48,12.94 SV2.2
  Bottom 0.254: v35.43,43.43 v37.47,41.4 | v41.53,40.64 45.59,40.64 48.9,37.34 v48.9,35.56
  Bottom 0.305: v44.83,18.03 44.83,23.37 v48.9,27.69
VREF  (via drill 0.5, 0.6)
  Top 0.254: R25.2 45.09,25.57 v45.09,26.92 | v23.24,26.92 20.7,29.72 18.92,29.72 17.31,31.33 C17.1 R18.2 R17.2 R16.2 17.14,39.12 17.14,40.64 17.65,41.15 26.04,41.15 28.32,43.43 v28.57,43.43 | U1.4 v37.21,50.29
  Top 0.305: U1.10 v33.4,45.72
  Bottom 0.254: v45.09,26.92 v23.24,26.92 | v28.57,43.43 29.08,43.43 31.37,45.72 v33.4,45.72 37.21,49.53 v37.21,50.29
VSYSTEM  (via drill 0.5)
  Top 0.254: U1.1 39.75,49 39.75,51.82 41.27,51.82 v45.59,47.5 | 41.27,31.45 41.27,32.77 v43.81,35.31 | v45.09,38.86 45.59,39.37 v45.59,43.43
  Top 0.406: U$6.D4 U$6.D3 | U$6.D3 U$6.D2 U$6.D1 | R32.1 38.39,11.7 | 38.39,11.7 U$6.DPAD | 38.39,11.7 37.76,11.7 U$6.D3 | C14.2 34.67,16.34 C29.1 37.97,16.34 C28.1 36.45,18.45 36.45,19.81 38.23,21.59 C27.1 38.39,21.76 39.75,23.11 39.75,27.43 41.3,28.98 Q3.D4 Q3.D3 Q3.D2 | Q3.D2 Q3.D1 41.27,31.45 | Q3.D2 40.97,30.48 Q3.DPAD
  Top 0.61: C14.2 R13.1 | R32.1 C28.1
  Bottom 0.254: v45.59,43.43 v45.59,47.5 | v45.09,38.86 43.81,37.59 v43.81,35.31

## Text on the board
tNames: Animatronic Tail Rev:A | Erik Hagerup | Kitsune Engineering
tValues: A5 | A4 | A3 | A2 | D0 | D1 | D12 | D13